# Altium PCB PCB1.PcbDoc
Units mil, origin at the board's own origin, x right, y up, seen from the top; angles counter-clockwise.
Board outline 3017.73 x 2679.53 mil, 4 copper layers (Top Layer, Layer 1, Layer 2, Bottom Layer), stack 62.449 mil thick; 49 components, 44 nets, 218 pads, 111 vias.
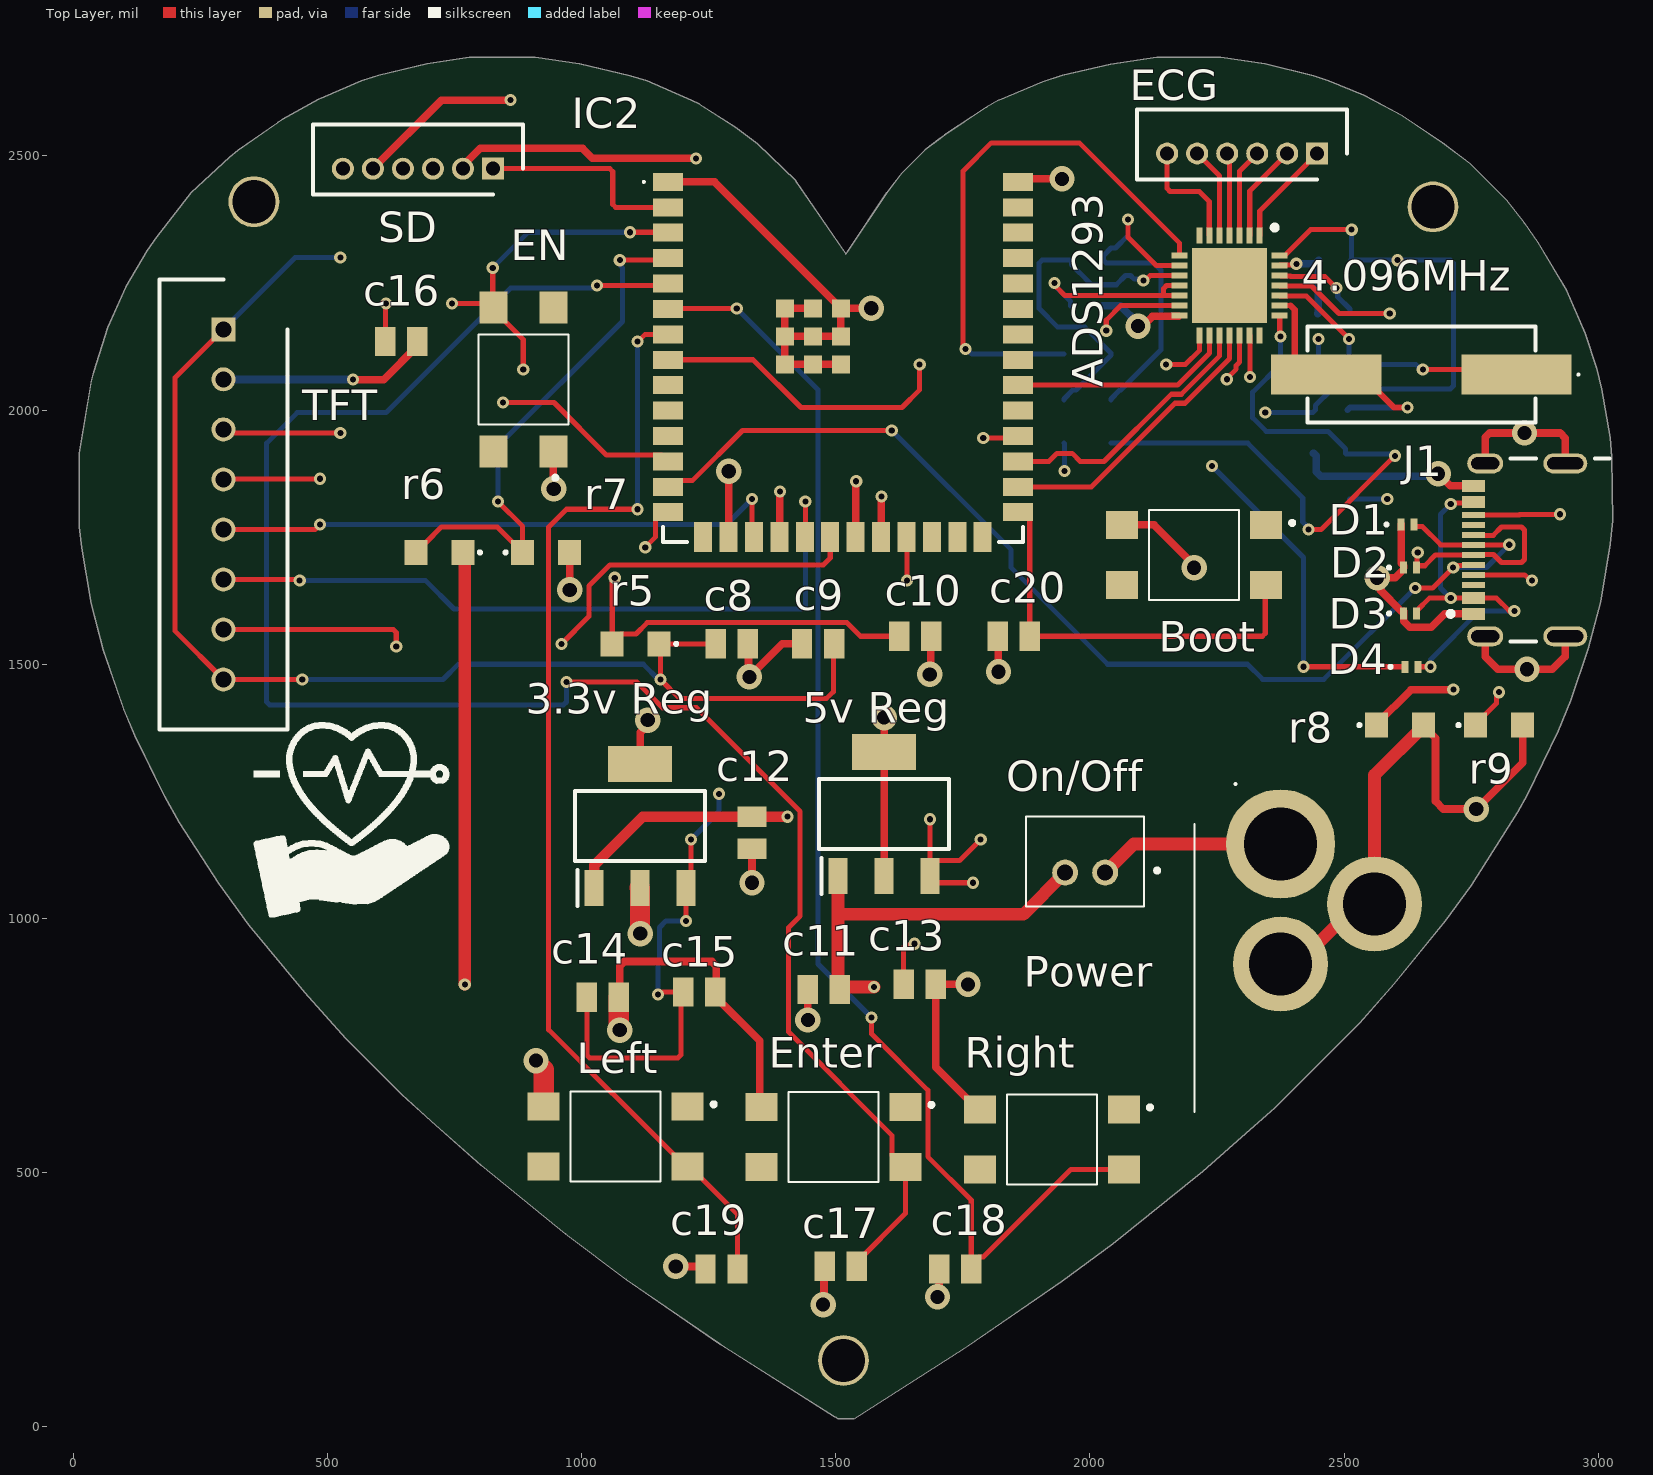
[diagram p0: Top Layer view]
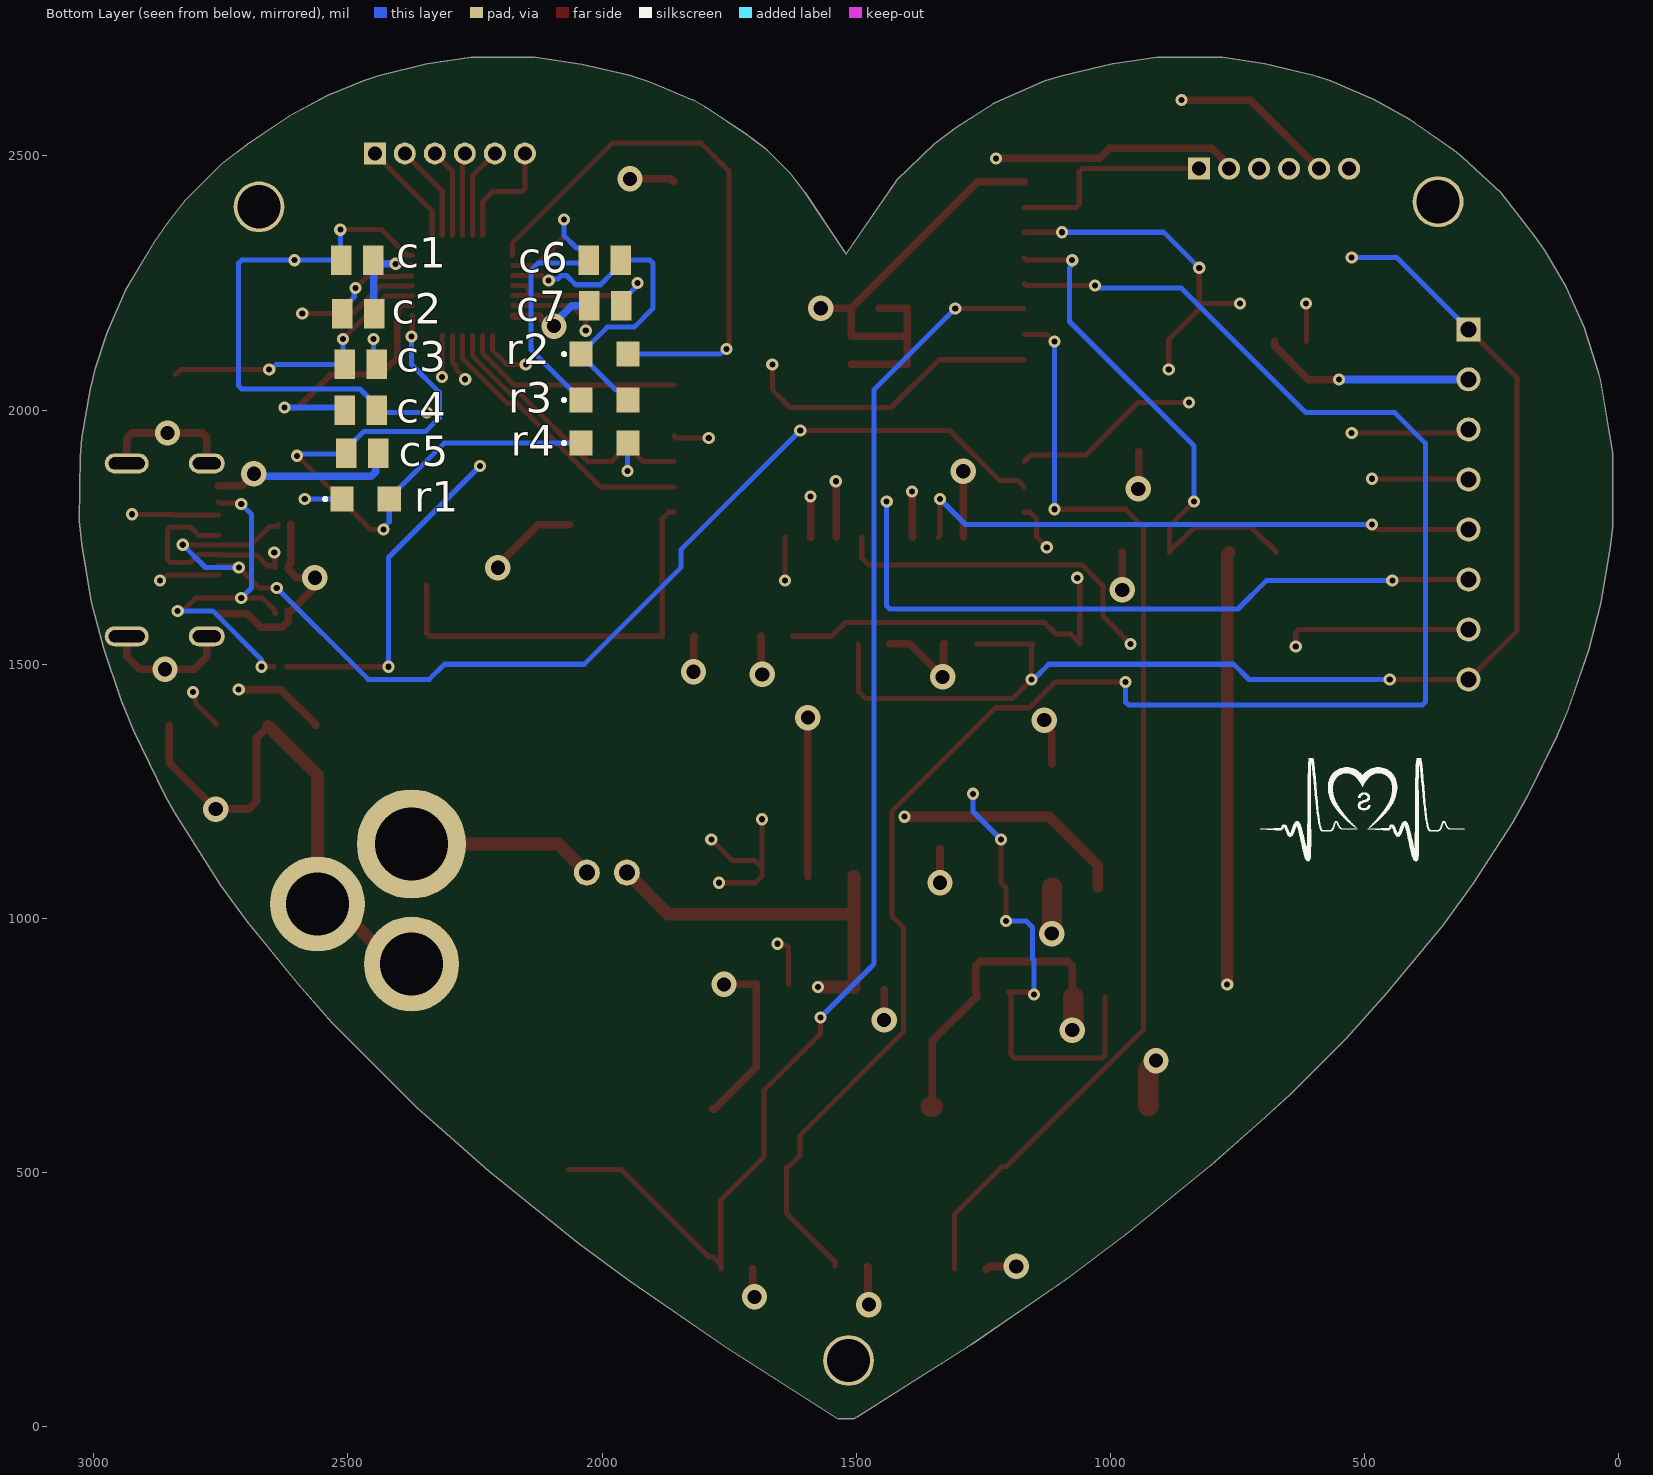
[diagram p1: Bottom Layer view, seen from below]
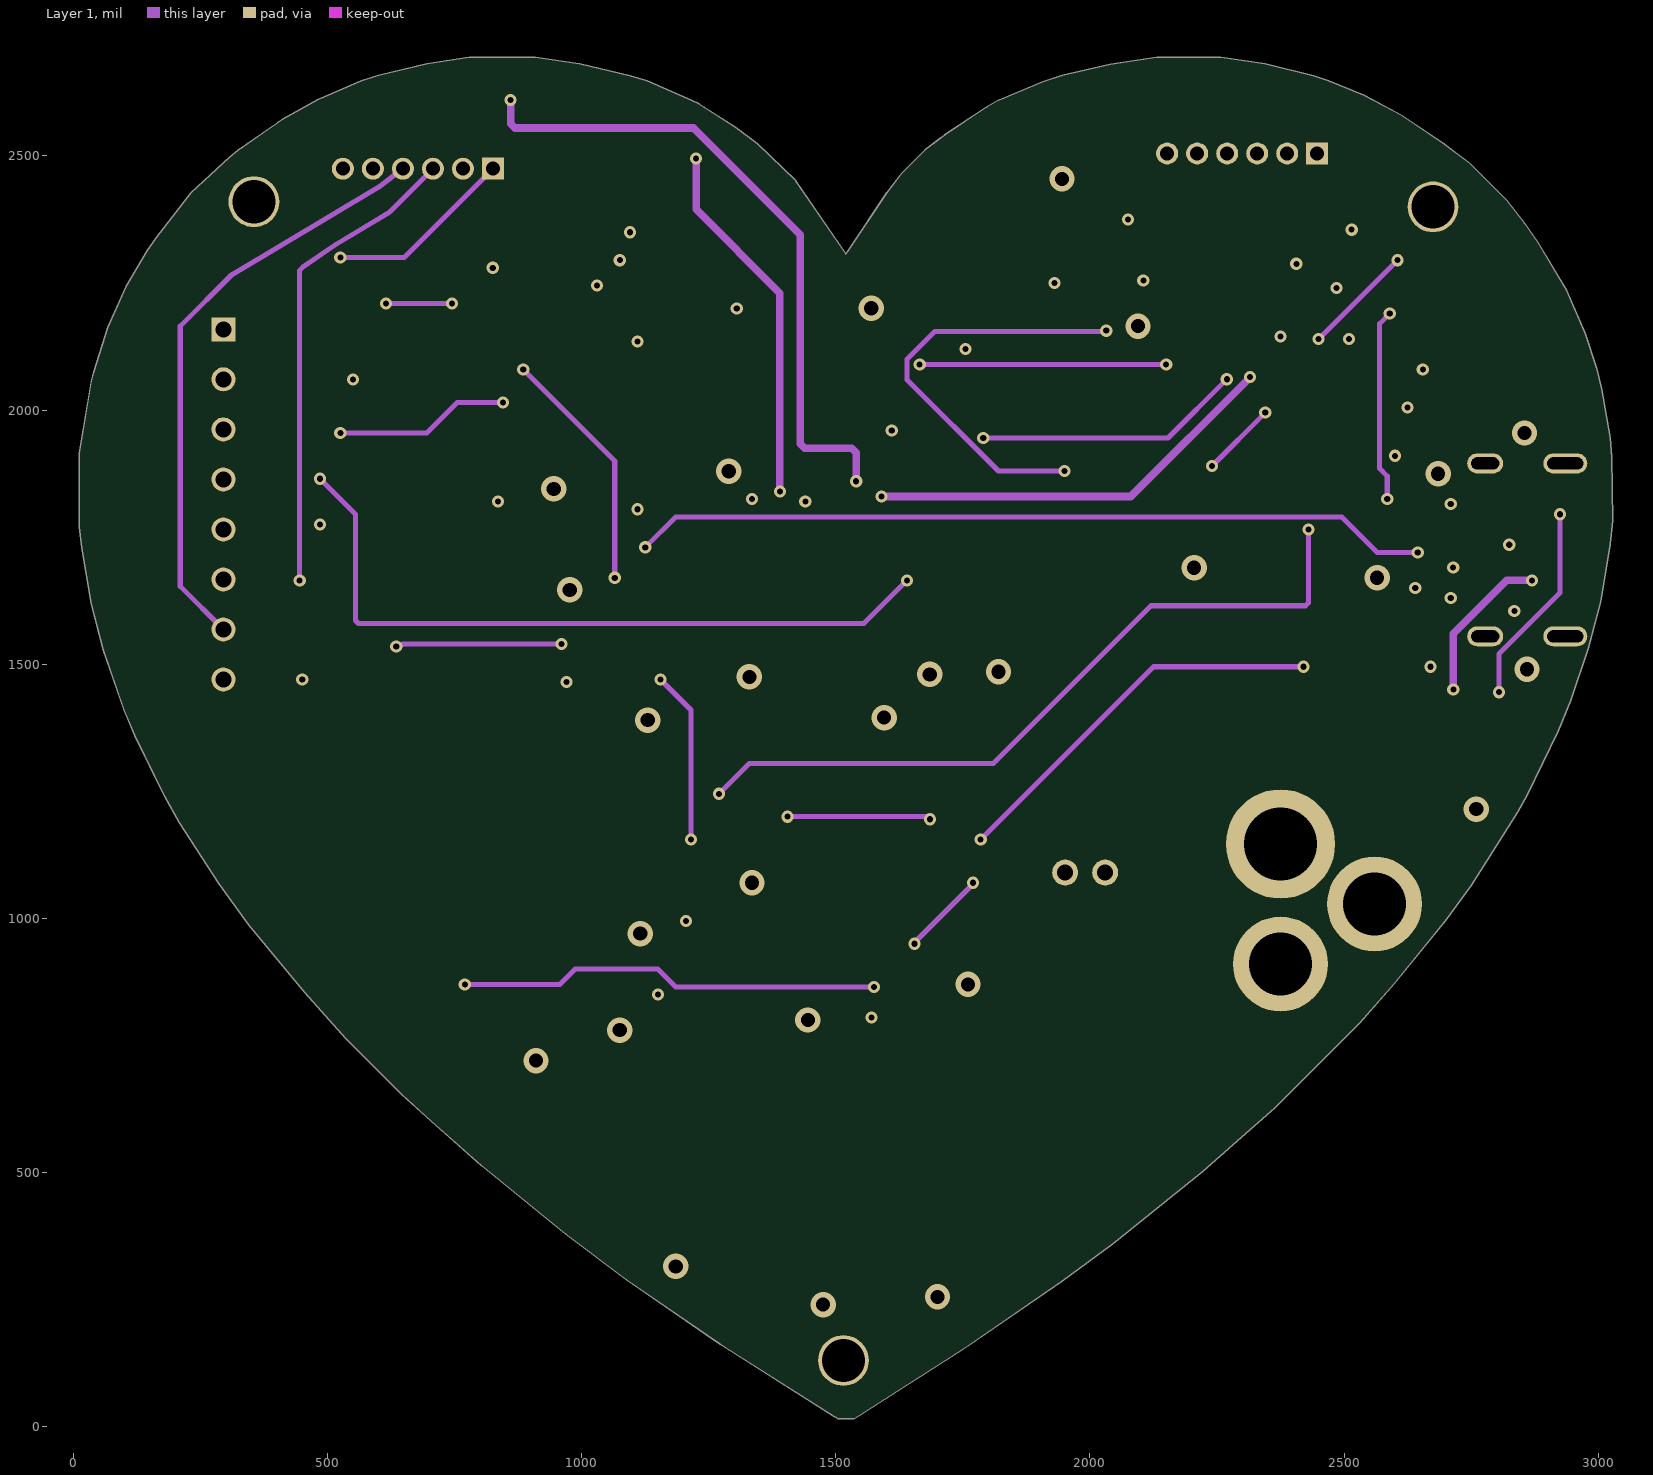
[diagram p2: Layer 1]
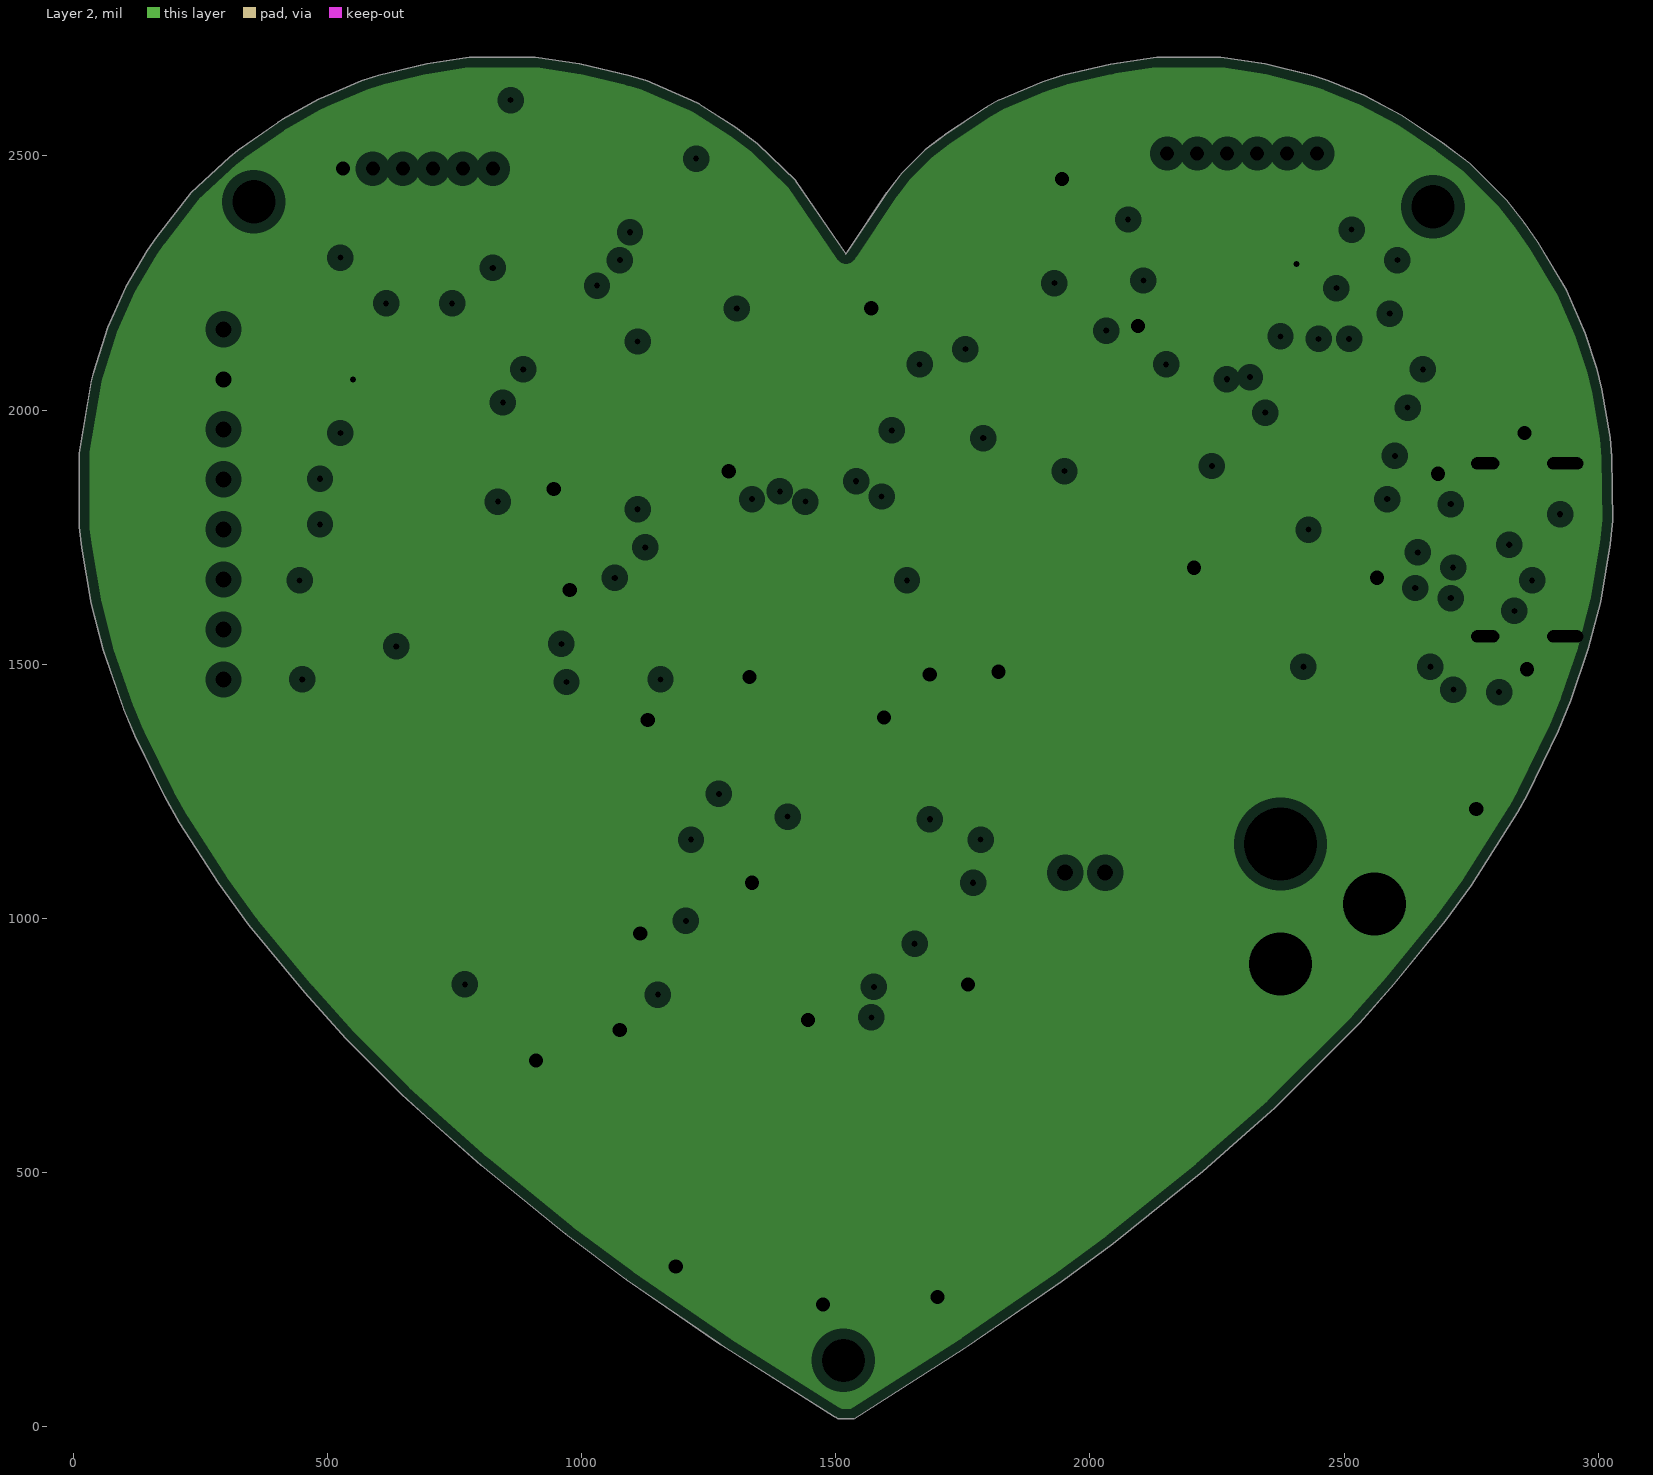
[diagram p3: Layer 2, clearances drawn from the general rule]
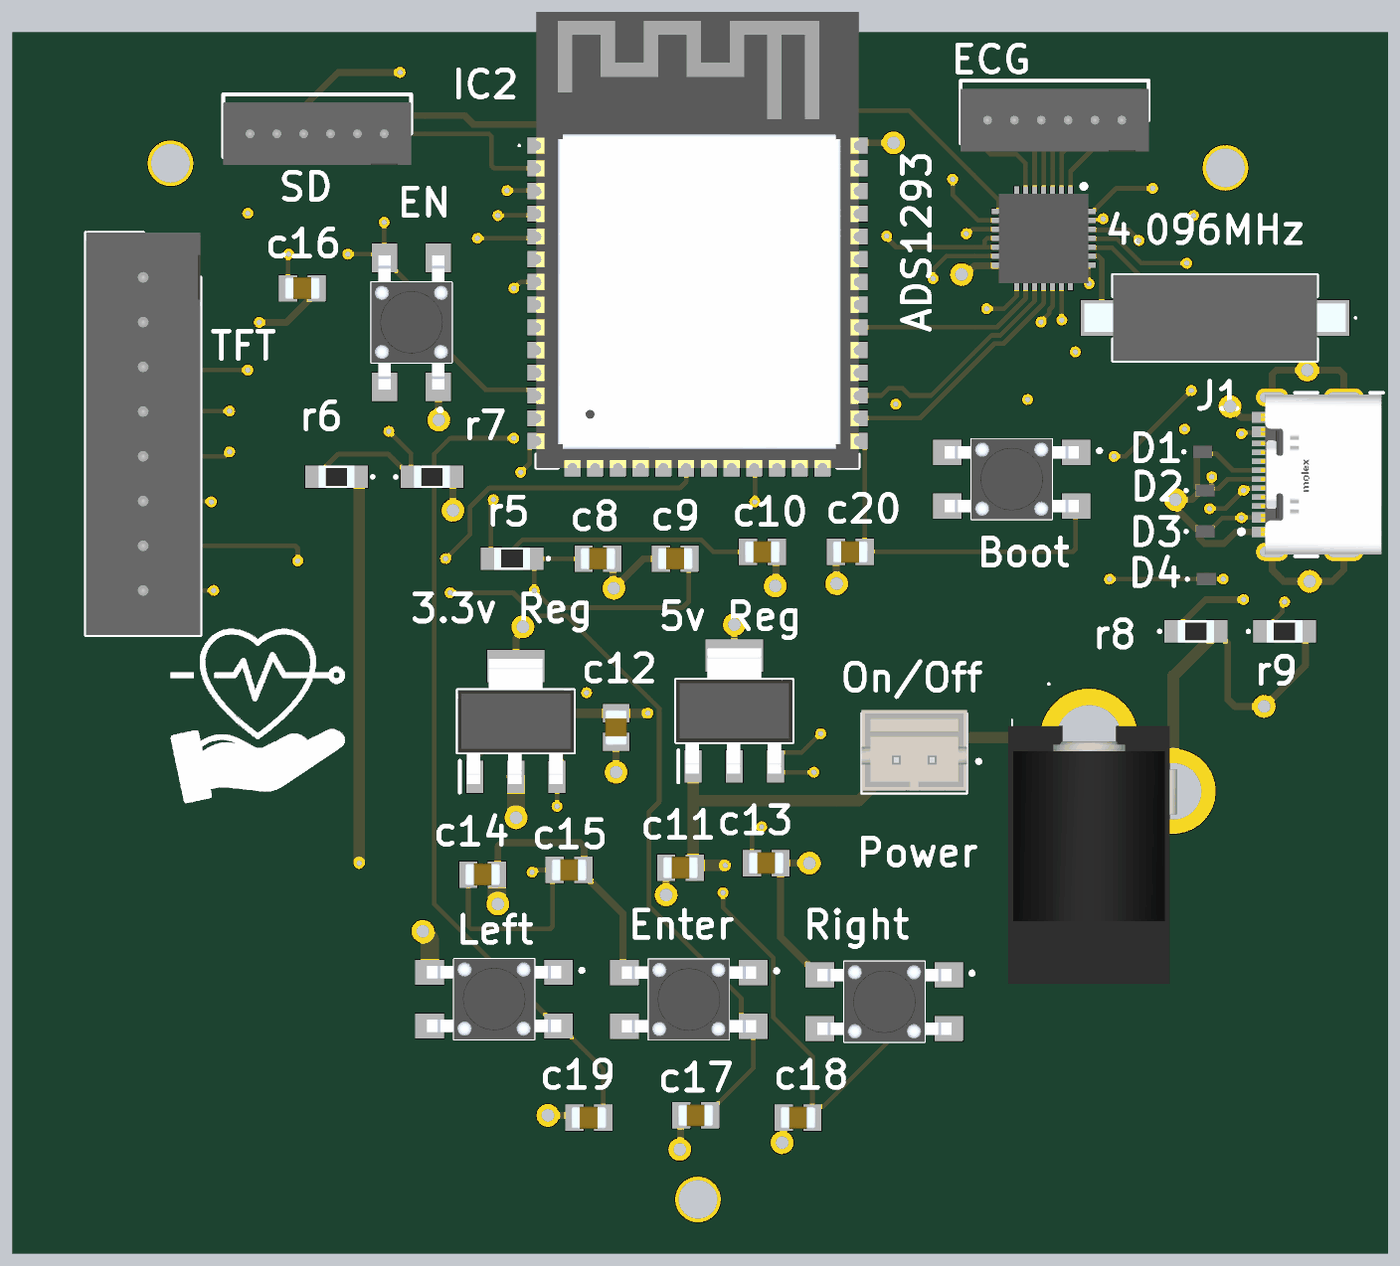
[diagram p4: 3D render of the assembled board from above, using the file's embedded part models]
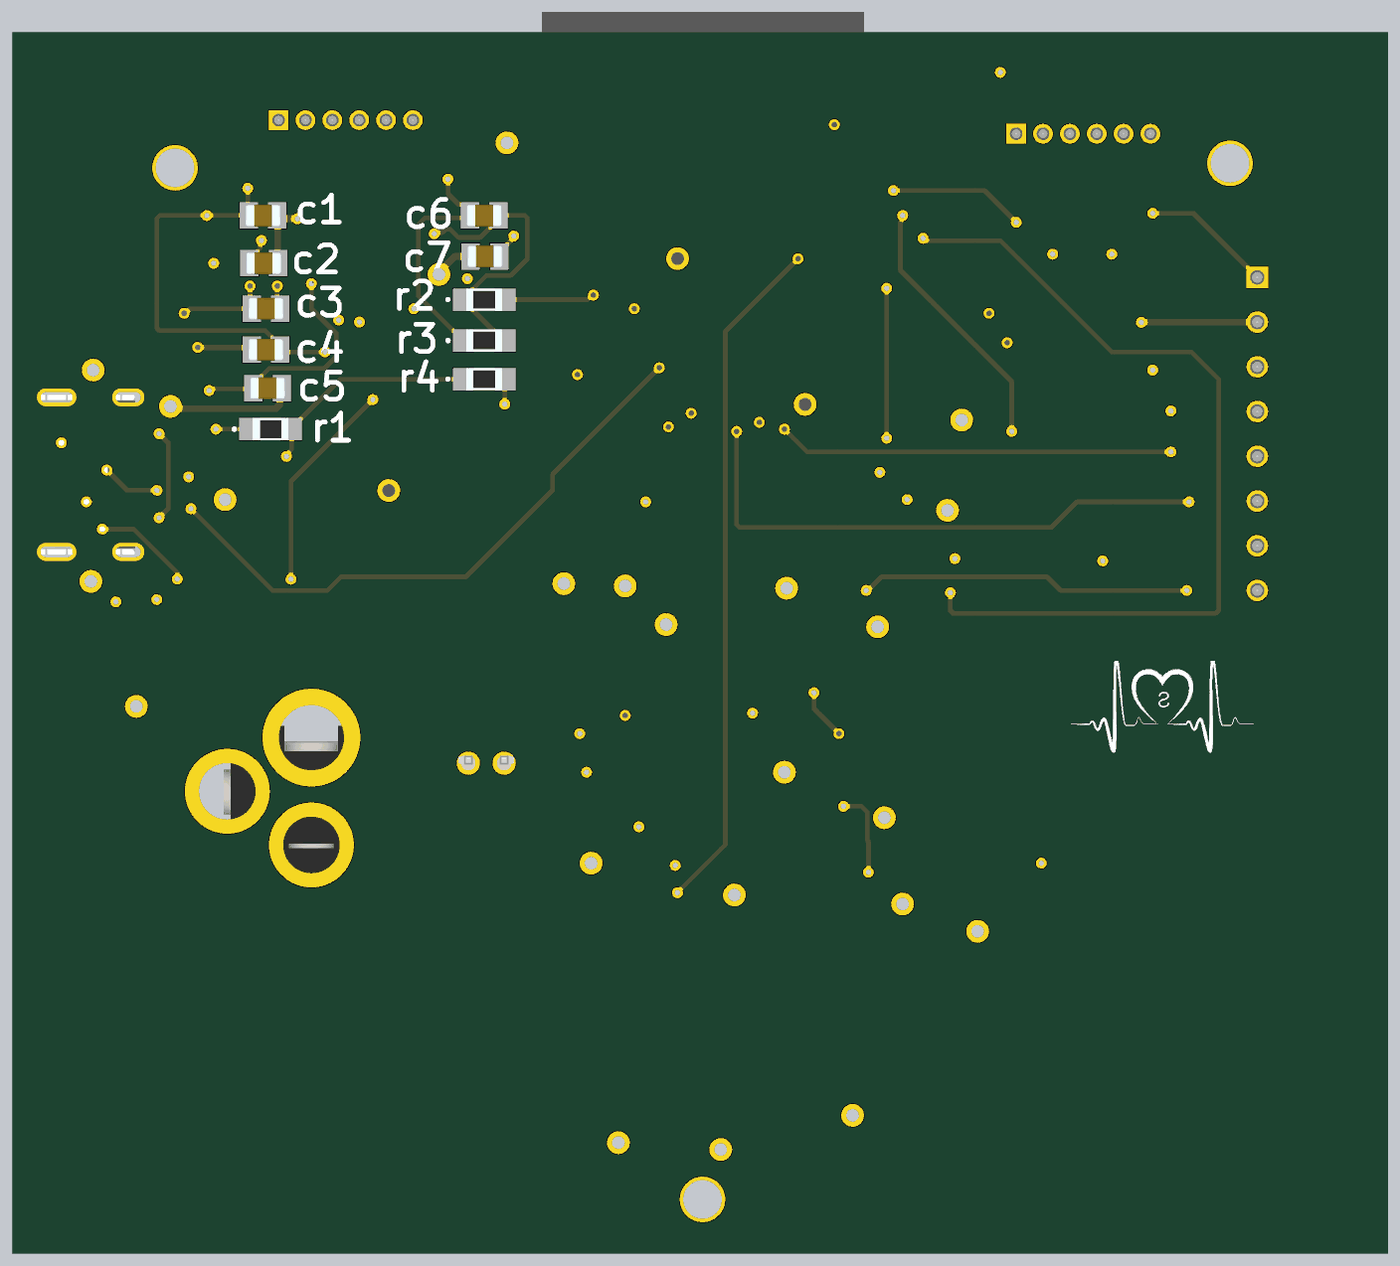
[diagram p5: 3D render of the assembled board from below, using the file's embedded part models]

## Layer stack, top to bottom
Top Solder: solder mask 0.4, Solder Resist, Dk 3.5
Top Layer: signal copper 1.378
Dielectric 2: prepreg 8.2835, PP-006, Dk 4.1
Layer 1: signal copper 0.5984
Dielectric 1: dielectric 41.9291, FR-4, Dk 4.8
Layer 2: plane copper 0.5984, net DGND
Dielectric 3: prepreg 8.2835, PP-006, Dk 4.1
Bottom Layer: signal copper 1.378
Bottom Solder: solder mask 0.4, Solder Resist, Dk 3.5

## Board outline
179.24,1239.27 120.6,1359.9 120.6,1359.92 99.32,1410.08 99.31,1410.09 58.09,1527.85 58.08,1527.87 35.28,1619.07 35.28,1619.09 16.65,1729.11 16.65,1729.12 11.14,1770.76 11.13,1770.8 11.13,1915.2 11.14,1915.25 35.4,2059.35 35.41,2059.38 40.21,2075.21 67.39,2162.66 67.4,2162.69 103.12,2241.73 103.13,2241.75 145.08,2313.65 145.1,2313.67 164.06,2340.37 164.07,2340.38 231.59,2428.36 231.62,2428.4 306.88,2497.72 306.9,2497.74 323.57,2511.08 323.59,2511.09 402.06,2566.09 410.84,2571.94 410.86,2571.95 482.09,2611.59 482.1,2611.6 486.66,2613.88 486.68,2613.88 566.48,2647.7 566.5,2647.71 600.65,2658.91 600.67,2658.92 695.6,2681.52 695.62,2681.52 778.96,2694.46 779,2694.47 908.2,2694.47 908.24,2694.46 995.38,2681.52 995.4,2681.52 1094.8,2657.8 1094.82,2657.79 1128.29,2647.72 1128.32,2647.7 1215.72,2610.08 1215.74,2610.08 1230.94,2602.48 1230.96,2602.46 1302.86,2556.71 1302.88,2556.7 1346.04,2524.32 1346.07,2524.3 1421.38,2451.19 1421.42,2451.15 1520,2307.07 1524.49,2313.67 1600.49,2427.66 1600.5,2427.68 1611.92,2442.78 1629.99,2466.36 1630.01,2466.39 1675.61,2511.99 1675.64,2512.01 1701.55,2531.92 1714.33,2541.5 1714.34,2541.51 1796.87,2596.38 1796.89,2596.39 1820.45,2610.07 1820.48,2610.09 1907.11,2646.18 1907.14,2646.19 1945.85,2658.91 1945.88,2658.92 2040.28,2680.8 2040.3,2680.8 2131.76,2694.46 2131.8,2694.47 2257.2,2694.47 2257.24,2694.46 2344.38,2681.52 2344.41,2681.52 2440.04,2657.6 2440.06,2657.59 2469.7,2647.71 2469.72,2647.7 2538.88,2619.2 2538.91,2619.19 2614.14,2579.68 2614.17,2579.66 2693.66,2526.31 2693.68,2526.3 2747.56,2485.41 2747.59,2485.39 2819.79,2413.19 2819.81,2413.16 2854.88,2368.15 2854.89,2368.14 2881.49,2330.14 2881.5,2330.12 2938.39,2234.92 2938.4,2234.88 2974.88,2150.53 2974.89,2150.5 2997.11,2082.15 2997.12,2082.13 3007.52,2040.96 3007.52,2040.93 3023.35,1945.49 3023.35,1945.47 3026.78,1907.78 3026.78,1907.76 3028.86,1782.2 3028.86,1782.17 3023.33,1736.71 3023.33,1736.7 3004.72,1622.9 3004.72,1622.87 2980.8,1531 2980.79,1530.98 2946.01,1428.34 2946,1428.32 2921.69,1368.28 2921.68,1368.26 2860.76,1243.07 2860.75,1243.06 2841.75,1208.86 2841.75,1208.84 2750.51,1064.54 2750.5,1064.53 2699.13,994.76 2699.12,994.75 2598.46,870.87 2598.45,870.86 2531,794.03 2530.99,794.01 2363.79,626.81 2363.77,626.8 2315.23,584.06 2222.37,502.34 2222.36,502.33 2045.25,359.88 2045.24,359.88 1945.07,285.7 1945.06,285.69 1760.14,158.51 1751.36,152.66 1535.34,14.98 1535.2,14.94 1504.8,14.94 1504.64,14.99 1500.48,18.01 1497.44,19.54 1281.05,156.45 1281.04,156.46 1269.64,164.06 1087.34,289.49 1087.33,289.5 968.16,378.88 968.15,378.88 802.44,513.73 802.43,513.74 703.71,601.15 645.82,653.4 645.81,653.41 535.61,763.61 535.6,763.62 454.86,854 454.85,854.01 344.68,987.15 344.67,987.16 285.7,1068.33 285.69,1068.34 208.02,1188.88 208.01,1188.89

## Design rules (kind name [scope] priority, off if disabled: settings)
Clearance [All] p1: gap=7.8 ignorepadtopadclearanceinfootprint=FALSE
PlaneClearance [All] p1: clearance=20
PlaneConnect [All] p1: pad.planeconnectstyle=Relief pad.reliefexpansion=20 pad.reliefentries=4 pad.reliefconductorwidth=10 pad.reliefairgap=10 via.planeconnectstyle=Direct via.reliefexpansion=20 via.reliefentries=4 via.reliefconductorwidth=10 via.reliefairgap=10
PolygonConnect [All] p1: connectstyle=Relief reliefconductorwidth=10 reliefentries=4 polygonreliefangle="90 Angle" airgapwidth=10
RoutingVias [All] p1: holewidth=12 width=24 viastyle="Through Hole" minholewidth=12 minwidth=24 maxholewidth=12 maxwidth=24
SolderMaskExpansion [All] p1: expansion=2 istentingtop=FALSE
SupplyNets "Schematic Supply Nets" [InNet('DGND')] p1: voltage=0.000
Width [All] p1: maxlimit=40 minlimit=8 preferedwidth=10 checkconnectedcopper=TRUE
28 further rules are at their usual default settings.

## Components (designator, comment, footprint, x,y, rotation, side; value= is the part's Value field where it differs from the comment)
"3.3v Reg" "TL1963A-33DCYR" SOT230P700X180-4N 1114.45,1182.05 r90 top
4.096MHz "ECS-41-20-5PX-TR" ECS41205PXTR 2652.01,2070 r180 top
"5v Reg" "LM7805MPX_NOPB" SOT230P700X180-4N 1595,1205 r90 top
ADS1293 "ADS1293CISQX_NOPB" QFN50P500X500X80-29N 2275,2245 r270 top
Boot "TL3305BF100QG" TL3305BF160QG 2205,1715 r180 top
c1 "0.1uF" CAPC2012X140N 2481.5,2295 r180 bottom
c2 "1uF" CAPC2012X140N 2480,2190 r180 bottom
c3 "22pF" CAPC2012X140N 2475,2090 r180 bottom
c4 "22pF" CAPC2012X140N 2475,2000 r180 bottom
c5 "0.1uF" CAPC2012X140N 2471.5,1915 r180 bottom
c6 "1.5nF" CAPC2012X140N 1995,2295 r180 bottom
c7 "0.1uF" CAPC2012X140N 1993.5,2205 r180 bottom
c8 "22uF" CAPC2012X140N 1295,1540 r180 top
c9 "0.1uF" CAPC2012X140N 1465,1540 r0 top
c10 "1uF" CAPC2012X140N 1656.5,1555 r180 top
c11 "0.22uF" CAPC2012X140N 1476.5,860 r0 top
c12 "4.7uF" CAPC2012X140N 1335,1168.5 r270 top
c13 "0.1uF" CAPC2012X140N 1665,870 r180 top
c14 "10uF" CAPC2012X140N 1041.5,845 r0 top
c15 "10uF" CAPC2012X140N 1231.5,855 r0 top
c16 "0.1uF" CAPC2012X140N 645,2135 r0 top
c17 "0.1uF" CAPC2012X140N 1510,315 r180 top
c18 "0.1uF" CAPC2012X140N 1735,310 r180 top
c19 "0.1uF" CAPC2012X140N 1275,310 r180 top
c20 "0.1uF" CAPC2012X140N 1850,1555 r180 top
D1 "AQ3045-01ETG" AQ304501ETG 2625,1775 r0 top
D2 "AQ3045-01ETG" AQ304501ETG 2630,1690 r0 top
D3 "AQ3045-01ETG" AQ304501ETG 2630,1600 r0 top
D4 "AQ3045-01ETG" AQ304501ETG 2632.8,1495 r0 top
ECG "B6B-ZR__LF__SN_" SHDR6W50P0X150_1X6_1050X350X450P 2447.17,2505 r0 top
EN "TL3305BF100QG" TL3305BF160QG 885,2060 r90 top
Enter "TL3305BF100QG" TL3305BF160QG 1495,570 r180 top
IC2 "ESP32-S3-WROOM-1-N16" ESP32S3WROOM1N16 1513.94,2241.97 r0 top
J1 "217179-0001" FP-2171790001-MFG 2890,1725 r90 top
Left "TL3305BF100QG" TL3305BF160QG 1066.73,570.95 r180 top
On/Off "B2B-PH-K-S__LF__SN_" B2BPHKSLFSN 2030,1090 r0 top
Power "PJ-002A" PJ002A 2375,1146.22 r90 top
r1 "1M" ERJUP6 2465,1825 r180 bottom
r2 "100k" ERJUP6 1995,2110 r180 bottom
r3 "1M" ERJUP6 1995,2020 r180 bottom
r4 "1M" ERJUP6 1995,1935 r180 bottom
r5 "10k" ERJUP6 1106.26,1540 r180 top
r6 "100k" ERJUP6 720,1720 r180 top
r7 "47k" ERJUP6 930,1720 r0 top
r8 "5.1k" ERJUP6 2610,1380 r0 top
r9 "5.1k" ERJUP6 2805,1380 r0 top
Right "TL3305BF100QG" TL3305BF160QG 1925,565 r180 top
SD "B6B-ZR__LF__SN_" SHDR6W50P0X150_1X6_1050X350X450P 825.28,2475 r0 top
TFT "B08B-XASK-1__LF__SN_" SHDR8W60P0X250_1X8_2250X640X880P 295,2158.98 r90 top

## Footprints (in the part's own frame and the unit in brackets; to place one, negate y for a bottom-side part, rotate by r counter-clockwise, add the part's x,y. Pads: shape width x height; smd on the part's side, far side on the other; paste and mask are expansions set on the pad)
AQ304501ETG [mm]
  rect 0.35x0.6 smd: 1(-0.325,0) 2(0.325,0)
  silkscreen extent -1.1,-0.05 -1,0.05, body extent -0.54,-0.34 0.54,0.34, height 0.43
B2BPHKSLFSN [mm]
  round 1.3 hole 0.8: 1(0,0) 2(-2,0)
  silkscreen extent -3.95,-1.7 2.7,2.8, body extent -3.95,-1.53 1.95,2.97, height 5.91
CAPC2012X140N [mm]
  rect 1.02x1.47 smd: 1(-0.8,0) 2(0.8,0)
  body extent -1,-0.63 1,0.63, height 1.4
ECS41205PXTR [mm]
  rect 5.5x2 smd: 1(-4.75,0) 2(4.75,0)
  silkscreen extent -7.9,-2.4 5.7,2.4, body extent -7.3,-2.4 7.3,2.4, height 4.4
ERJUP6 [mm]
  rect 1.15x1.25 smd: 1(-1.175,0) 2(1.175,0)
  silkscreen extent -2.07,-0.05 -1.98,0.05, body extent -1,-0.63 1,0.63, height 0.6
ESP32S3WROOM1N16 [mm]
  rect 1.5x0.9 smd: 1(-8.75,5.26) 2(-8.75,3.99) 3(-8.75,2.72) 4(-8.75,1.45) 5(-8.75,0.18) 6(-8.75,-1.09) 7(-8.75,-2.36) 8(-8.75,-3.63) 9(-8.75,-4.9) 10(-8.75,-6.17) 11(-8.75,-7.44) 12(-8.75,-8.71) 13(-8.75,-9.98) 14(-8.75,-11.25) 27(8.75,-11.25) 28(8.75,-9.98) 29(8.75,-8.71) 30(8.75,-7.44) 31(8.75,-6.17) 32(8.75,-4.9) 33(8.75,-3.63) 34(8.75,-2.36) 35(8.75,-1.09) 36(8.75,0.18) 37(8.75,1.45) 38(8.75,2.72) 39(8.75,3.99) 40(8.75,5.26)
  rect 0.9x1.5 smd: 15(-6.985,-12.5) 16(-5.715,-12.5) 17(-4.445,-12.5) 18(-3.175,-12.5) 19(-1.905,-12.5) 20(-0.635,-12.5) 21(0.635,-12.5) 22(1.905,-12.5) 23(3.175,-12.5) 24(4.445,-12.5) 25(5.715,-12.5) 26(6.985,-12.5)
  rect 0.9x0.9 smd: 41(-1.5,-2.46) 42(-1.5,-1.06) 43(-2.9,-1.06) 44(-2.9,-2.46) 45(-2.9,-3.86) 46(-1.5,-3.86) 47(-0.1,-3.86) 48(-0.1,-2.46) 49(-0.1,-1.06)
  silkscreen extent -10,-12.75 9,5.31, body extent -9,-12.76 9,12.74, height 3.25
FP-2171790001-MFG [mm]
  rect 0.6x1.15 smd paste+0 mask+0: A1B12(-3.2,3.425) A4B9(-2.4,3.425) B1A12(3.2,3.425) B4A9(2.4,3.425)
  rect 0.3x1.15 smd paste+0 mask+0: A5(-1.25,3.425) A6(-0.25,3.425) A7(0.25,3.425) A8(1.25,3.425) B5(1.75,3.425) B6(0.75,3.425) B7(-0.75,3.425) B8(-1.75,3.425)
  rrect100% 1x1.8 hole 1.4 slot 0.6 at 0 deg paste-2539.97 mask+0: S1(-4.32,2.85) S2(4.32,2.85)
  rrect100% 1x2.2 hole 1.8 slot 0.6 at 0 deg paste-2539.97 mask+0: S3(-4.32,-1.15) S4(4.32,-1.15)
  silkscreen extent -4.57,-3.35 4.57,4.7, body extent -4.92,-3.45 4.92,4.1, height 0.25
PJ002A [mm]
  round 5.46 hole 3.64: 1(0,0)
  round 4.74 hole 3.16: 2(-6,0) 3(-3,-4.7)
  silkscreen extent -13.4,2.2 3.05,4.3, body extent -13.75,-4.9 0.65,4.5, height 11
QFN50P500X500X80-29N [mm]
  rect 0.8x0.3 smd: 1(-2.5,1.5) 2(-2.5,1) 3(-2.5,0.5) 4(-2.5,0) 5(-2.5,-0.5) 6(-2.5,-1) 7(-2.5,-1.5) 15(2.5,-1.5) 16(2.5,-1) 17(2.5,-0.5) 18(2.5,0) 19(2.5,0.5) 20(2.5,1) 21(2.5,1.5)
  rect 0.3x0.8 smd: 8(-1.5,-2.5) 9(-1,-2.5) 10(-0.5,-2.5) 11(0,-2.5) 12(0.5,-2.5) 13(1,-2.5) 14(1.5,-2.5) 22(1.5,2.5) 23(1,2.5) 24(0.5,2.5) 25(0,2.5) 26(-0.5,2.5) 27(-1,2.5) 28(-1.5,2.5)
  rect 3.75x3.75 smd: 29(0,0)
  silkscreen extent -3.02,2.13 -2.78,2.38, body extent -2.5,-2.5 2.5,2.5, height 0.8
SHDR6W50P0X150_1X6_1050X350X450P [mm]
  rect 1.1x1.1 hole 0.7: 1(0,0)
  round 1.1 hole 0.7: 2(-1.5,0) 3(-3,0) 4(-4.5,0) 5(-6,0) 6(-7.5,0)
  silkscreen extent -9,-1.3 1.5,2.2, body extent -9,-1.75 1.5,1.75, height 4.5
SHDR8W60P0X250_1X8_2250X640X880P [mm]
  rect 1.2x1.2 hole 0.8: 1(0,0)
  round 1.2 hole 0.8: 2(-2.5,0) 3(-5,0) 4(-7.5,0) 5(-10,0) 6(-12.5,0) 7(-15,0) 8(-17.5,0)
  silkscreen extent -20,-3.2 2.5,3.2, body extent -20,-3.2 2.5,3.2, height 8.8
SOT230P700X180-4N [mm]
  rect 1.8x0.95 smd: 1(-3.1,2.3) 2(-3.1,0) 3(-3.1,-2.3)
  rect 1.8x3.2 smd: 4(3.1,0)
  silkscreen extent -4,-3.25 1.75,3.25, body extent -3.5,-3.25 3.5,3.25, height 1.68
TL3305BF160QG [mm]
  rect 1.6x1.4 smd: 1(-3.6,-1.5) 2(3.6,-1.5) 3(-3.6,1.5) 4(3.6,1.5)
  silkscreen extent -5,-2.25 2.25,2.25, body extent -3.75,-2.25 3.75,2.25, height 4.9

## Part data
"3.3v Reg": "Power Supply", Manufacturer_Name="Texas Instruments", Mouser Part Number=595-TL1963A-33DCYR, Arrow Part Number=TL1963A-33DCYR, Arrow Price/Stock=https://www.arrow.com/en/products/tl1963a-33dcyr/texas-instruments?utm_currency=USD&region=nac, Datasheet Link=http://www.ti.com/lit/gpn/tl1963a, Height=1.8mm, Manufacturer_Part_Number=TL1963A-33DCYR, Mouser Price/Stock=https://www.mouser.co.uk/ProductDetail/Texas-Instruments/TL1963A-33DCYR?qs=IK5e5L0zOXhRu%2FNTAfJNEA%3D%3D
4.096MHz: "Crystal or Oscillator", Manufacturer_Name=ECS, Mouser Part Number=520-CSM409-20-X, Arrow Part Number=ECS-41-20-5PX-TR, Arrow Price/Stock=https://www.arrow.com/en/products/ecs-41-20-5px-tr/ecs-international, Datasheet Link=https://www.ecsxtal.com/store/pdf/csm-7x.pdf, Height=4.3mm, Manufacturer_Part_Number=ECS-41-20-5PX-TR, Mouser Price/Stock=https://www.mouser.co.uk/ProductDetail/ECS/ECS-41-20-5PX-TR?qs=CkbNAJEAr%2FSFHGf3GK%252BDrQ%3D%3D
"5v Reg": "Integrated Circuit", Arrow Part Number=LM7805MPX/NOPB, Manufacturer_Name="Texas Instruments", Mouser Part Number=595-LM7805MPX/NOPB, Arrow Price/Stock=https://www.arrow.com/en/products/lm7805mpxnopb/texas-instruments?region=nac, Datasheet Link=https://www.arrow.com/en/products/lm7805mpxnopb/texas-instruments, Height=1.8mm, Manufacturer_Part_Number=LM7805MPX/NOPB, Mouser Price/Stock=https://www.mouser.co.uk/ProductDetail/Texas-Instruments/LM7805MPX-NOPB?qs=gO6GG99qvRCSwIVAoVKHPw%3D%3D
ADS1293: "Integrated Circuit", Arrow Part Number=ADS1293CISQX/NOPB, Manufacturer_Name="Texas Instruments", Mouser Part Number=595-ADS1293CISQXNPB, Arrow Price/Stock=https://www.arrow.com/en/products/ads1293cisqxnopb/texas-instruments?region=nac, Datasheet Link=https://www.arrow.com/en/products/ads1293cisqxnopb/texas-instruments?region=nac, Height=0.8mm, Manufacturer_Part_Number=ADS1293CISQX/NOPB, Mouser Price/Stock=https://www.mouser.co.uk/ProductDetail/Texas-Instruments/ADS1293CISQX-NOPB?qs=T1E5mKGHTGVRqLM5czdGYQ%3D%3D
Boot EN Enter Left Right: "Switch", Manufacturer_Name=E-Switch, Mouser Part Number=612-TL3305BF100QG, Datasheet Link=https://configured-product-images.s3.amazonaws.com/2D/specs/TL3305BF100QG.pdf, Manufacturer_Part_Number=TL3305BF100QG, Mouser Price/Stock=https://www.mouser.co.uk/ProductDetail/E-Switch/TL3305BF100QG?qs=IKkN%2F947nfDIPwqPQja%252BvQ%3D%3D
c1 c2 c3 c4 c5 c6 c7 c8 c9 c10 c11 c12 c13 c14 c15 c16 c17 c18 c19 c20: library part 0805_1, "Capacitor", Manufacturer_Name=KEMET, Manufacturer_Part_Number=C0805C274K1RACTU, Mouser Part Number=80-C0805C274K1RACTU, Datasheet Link=https://search.kemet.com/component-documentation/download/specsheet/C0805C274K1RACTU, Height=1.4mm, Mouser Price/Stock=https://www.mouser.co.uk/ProductDetail/KEMET/C0805C274K1RACTU?qs=wT7LY0lnAe2hDy7V5z73eA%3D%3D
D1 D2 D3 D4: "TVS Diode (Bi-directional)", Manufacturer_Name=LITTELFUSE, Mouser Part Number=576-AQ3045-01ETG, Arrow Part Number=AQ3045-01ETG, Arrow Price/Stock=https://www.arrow.com/en/products/aq3045-01etg/littelfuse?region=nac, Datasheet Link=http://m.littelfuse.com/~/media/electronics/datasheets/tvs_diode_arrays/littelfuse_tvs_diode_array_aq3045_datasheet.pdf.pdf, Height=0.42mm, Manufacturer_Part_Number=AQ3045-01ETG, Mouser Price/Stock=https://www.mouser.co.uk/ProductDetail/Littelfuse/AQ3045-01ETG?qs=lM4gFlnEeEMEfe%252B5jSw4OA%3D%3D
ECG SD: "Connector", Manufacturer_Name="JST (JAPAN SOLDERLESS TERMINALS)", Manufacturer_Part_Number="B6B-ZR (LF)(SN)", Height=4.5mm
IC2: "Integrated Circuit", Manufacturer_Name="Espressif Systems", Mouser Part Number=356-ESP32S3WROOM1N16, Datasheet Link=https://www.espressif.com/sites/default/files/documentation/esp32-s3-wroom-1_wroom-1u_datasheet_en.pdf, Height=3.25mm, Manufacturer_Part_Number=ESP32-S3-WROOM-1-N16, Mouser Price/Stock=https://www.mouser.co.uk/ProductDetail/Espressif-Systems/ESP32-S3-WROOM-1-N16?qs=Li%252BoUPsLEntjPrtJwwS5Pw%3D%3D
J1: "CONN RCP USB2.0 TYP C 24P SMD RA", LCSC Part Number=C3197684, Manufacturer=Molex, Supplier Part Number=900-2171790001CT-ND, Category=Connectors, Manufacturer Part Number=217179-0001, Pricing="1=0,79, 10=0,645, 25=0,5948, 50=0,5594, 100=0,5259, 250=0,48484, 500=0,45592 (USD)", RoHS=No, Stock=7013, Supplier=Digikey
On/Off: "Circulator or Directional Coupler", Manufacturer_Name="JST (JAPAN SOLDERLESS TERMINALS)", Manufacturer_Part_Number="B2B-PH-K-S (LF)(SN)", Datasheet Link=http://www.jst-mfg.com/product/pdf/eng/ePH.pdf, Height=6mm
Power: "Integrated Circuit", Manufacturer_Name="Same Sky", Mouser Part Number=490-PJ-002A, Arrow Part Number=PJ-002A, Arrow Price/Stock=https://www.arrow.com/en/products/pj-002a/cui-devices?utm_currency=USD&region=europe, Datasheet Link=https://www.sameskydevices.com/product/resource/supplyframepdf/pj-002a.pdf, Height=11mm, Manufacturer_Part_Number=PJ-002A, Mouser Price/Stock=https://www.mouser.co.uk/ProductDetail/CUI-Devices/PJ-002A?qs=WyjlAZoYn51CKfAix9Mngw%3D%3D
r1 r2 r3 r4 r5 r6 r7 r8 r9: library part 0805, "Resistor", Manufacturer_Name=Panasonic, Manufacturer_Part_Number=ERJ-UP6D36R0V, Mouser Part Number=667-ERJ-UP6D36R0V, Datasheet Link=https://industrial.panasonic.com/cdbs/www-data/pdf/RDP0000/AOA0000C337.pdf, Height=0.7mm, Mouser Price/Stock=https://www.mouser.co.uk/ProductDetail/Panasonic/ERJ-UP6D36R0V?qs=ZcfC38r4PouQYziqW4pNbg%3D%3D
TFT: "Connector", Manufacturer_Name="JST (JAPAN SOLDERLESS TERMINALS)", Manufacturer_Part_Number="B08B-XASK-1 (LF)(SN)", Datasheet Link=http://uk.rs-online.com/web/p/products/1667521, Height=8.8mm

## Free pads (board coordinates)
  round 100 hole 85: 1(2675,2400) 2(1515,130) 3(355,2410)

## Via types
v1: diameter 24, hole 12, Top Layer to Bottom Layer, 85 vias
v2: diameter 50, hole 28, Top Layer to Bottom Layer, 26 vias

## Nets (pads, with @x,y where several pads share a name; then routed paths per layer and width w, separated by ;. In a path a pad name is that pad's centre, name@x,y a point inside that pad or via, vN(x,y) a via of type N, cw(c..) or ccw(c..) an arc to the next point about the centre after c; other vN are vias at no path point)
0: Boot.3 c20.1 IC2.27 | length 821.4
  Top Layer w10: IC2.27 1868.78,1799.05 1881.5,1786.34 c20.1 2339.14,1555 2345,1560.86 2345,1654.21 Boot.3
3.3v: "3.3v Reg.3" ADS1293.22 c5.1 c8.2 c9.2 c14.1 c15.1 IC2.2 r1.2 r4.1 r5.1 SD.1 TFT.1 TFT.8 | length 7374.1
  Top Layer w10: TFT.1 200,2063.98 200,1565 TFT.8 v1(450,1470) ; SD.1 1055.13,2475 1060.99,2469.14 1060.99,2404.91 1066.85,2399.05 IC2.2 ; c14.1 1010,730.86 1015.86,725 1189.14,725 1195,730.86 1195,850 c15.1 1158.79,855 1153.79,850 v1(1150,850) ; v1(1205,995) 1205,1060 1215,1070 v1(1215,1155) ; c8.2 r5.1 1155,1537.52 v1(1155,1470) 1192.8,1432.2 1481.34,1432.2 1495,1445.86 1495,1538.5 c9.2 ; ADS1293.22 2373.42,2156.58 2375,2155 v1(2375,2145) ; v1(2430,1765) 2455,1765 v1(2600,1910)
  Layer 1 w10: v1(525,2300) 650.28,2300 SD.1 ; v1(1155,1470) 1215,1410 v1(1215,1155) ; v1(1270,1245) 1330,1305 1810,1305 2120,1615 2424.14,1615 2430,1620.86 v1(2430,1765)
  Bottom Layer w10: TFT.1 436.02,2300 v1(525,2300) ; v1(450,1470) 727.13,1470 757.13,1500 1121.21,1500 1151.21,1470 v1(1155,1470) ; v1(1150,850) 1150,917.8 1152.8,920.6 1152.8,981.94 1165.86,995 v1(1205,995) ; v1(1215,1155) 1270,1210 v1(1270,1245) ; r4.1 2310.71,1935 2418.74,1826.97 r1.2 2418.74,1780.05 2430,1768.79 v1(2430,1765) ; v1(2375,2145) 2375,2089.93 2320.2,2035.13 2320.2,1984.73 2346.66,1958.26 2468.59,1958.26 2502.99,1923.86 c5.1 2504.24,1913.76 2592.46,1913.76 2596.21,1910 v1(2600,1910)
4: IC2.4 r6.2 r7.1 | length 1046.6
  Top Layer w10: r6.2 673.74,1721.97 691.38,1739.61 693.35,1739.61 723.74,1770 833.74,1770 864.13,1739.61 866.1,1739.61 r7.1@883.74,1721.97 ; v1(835,1820) 883.74,1771.26 r7.1@883.74,1721.97 ; r7.1 r7.1@883.74,1721.97 ; v1(1075,2295) 1165.39,2295 IC2.4
  Bottom Layer w10: v1(835,1820) 835,1929.39 1080,2174.39 1080,2280 1077.68,2282.32 1077.68,2292.32 v1(1075,2295)
5: c17.1 Enter.3 IC2.5 | length 3669.4
  Top Layer w10: v1(970,1465) 1108.46,1465 1159.06,1414.4 1225.67,1414.4 1429.8,1210.27 1429.8,1004.49 1407.2,981.89 1407.2,776.1 1610.24,573.06 1610.24,533.5 1632.8,510.94 Enter.3 1636.73,419.09 1541.5,323.86 c17.1 ; v1(1030,2245) 1165.39,2245 IC2.5
  Bottom Layer w10: v1(970,1465) 970,1425.86 964.14,1420 385.86,1420 380,1425.86 380,1935 440,1995 615,1995 860,2240 1025,2240 v1(1030,2245)
5v: "3.3v Reg.1" "5v Reg.3" ADS1293.28 c1.1 c3.2 c4.2 c12.1 c13.2 D4.1 | length 4285.6
  Top Layer w10: 1023.9,1060 1024.58,1060.68 ; c13.2 1633.5,943.5 1637.32,947.32 1652.32,947.32 v1(1655,950) ; v1(1685,1195) 1685,1083.5 1685.55,1082.95 ; v1(1770,1070) 1698.5,1070 1685.55,1082.95 ; v1(1785,1155) 1743.39,1113.39 1699.25,1113.39 1685.55,1099.68 1685.55,1082.95 ; ADS1293.28 2383.27,2304.05 2434.21,2355 v1(2515,2355) ; v1(2420,1495) D4.1
  Top Layer w20: 1024.58,1060.68 1024.58,1104.58 1120,1200 c12.1 v1(1405,1200)
  Layer 1 w10: v1(1405,1200) 1680,1200 v1(1685,1195) ; v1(1655,950) 1655,952.5 1770,1067.5 v1(1770,1070) ; v1(1785,1155) 2125,1495 v1(2420,1495) ; v1(2240,1890) v1(2345,1995) ; v1(2450,2140) v1(2605,2295)
  Bottom Layer w10: v1(2240,1890) 2420,1710 v1(2420,1495) ; v1(2345,1995) 2438.5,1995 c4.2 2443.5,2008.86 2476.38,2041.74 2709.14,2041.74 2715,2047.59 2715,2289.14 2709.14,2295 v1(2605,2295) c1.1 2515,2297.01 v1(2515,2355) ; c3.2 2450,2096.5 v1(2450,2140)
6: c18.1 IC2.6 Right.3 | length 2594.8
  Top Layer w10: IC2.6 1170.39,2200 v1(1305,2200) ; v1(1570,805) 1570,772.94 1681.03,661.91 1681.03,531.03 1766.5,445.56 c18.1@1766.5,318.86 ; c18.1 c18.1@1766.5,318.86 ; Right.3 1962.44,505.94 1790.43,333.94 1781.57,333.94 c18.1@1766.5,318.86
  Bottom Layer w10: v1(1305,2200) 1464.8,2040.2 1464.8,910.2 v1(1570,805)
7: c19.1 IC2.7 Left.3 | length 2203.7
  Top Layer w10: v1(1110,1805) 970,1805 935,1770 935,780.68 1060.62,655.07 1061.35,655.07 1204.53,511.89 Left.3 1212.4,511.89 1306.5,417.8 c19.1 ; v1(1110,2135) 1110.87,2135 1124.92,2149.05 IC2.7
  Bottom Layer w10: v1(1110,1805) v1(1110,2135)
8: IC2.12 TFT.3 | length 950.3
  Top Layer w10: TFT.3 302.13,1955 v1(525,1955) ; v1(845,2015) 945.24,2015 1048.47,1911.77 1156.73,1911.77 IC2.12
  Layer 1 w10: v1(525,1955) 695,1955 755,2015 v1(845,2015)
9: IC2.17 TFT.5 | length 1141.5
  Top Layer w10: TFT.5 475.28,1765.28 v1(485,1775) ; v1(1335,1825) 1335,1753.78 IC2.17
  Bottom Layer w10: v1(485,1775) 1285,1775 v1(1335,1825)
10: IC2.18 SD.2 | length 1301
  Top Layer w15: SD.2 766.22,2480.89 800.33,2515 1001.45,2515 1021.15,2495.3 1224.7,2495.3 v1(1225,2495) ; IC2.18 1389.47,1750.37 1389.47,1839.47 v1(1390,1840)
  Layer 1 w15: v1(1225,2495) 1225,2395 1390,2230 v1(1390,1840)
11: IC2.19 SD.3 TFT.6 | length 2389.2
  Top Layer w10: TFT.6 443.15,1666.85 v1(445,1665) ; IC2.19 1440,1750.9 v1(1440,1820)
  Layer 1 w10: v1(445,1665) 445,2270.93 445,2275.07 450.86,2280.93 514.73,2324.8 621.62,2389.45 624.54,2392.38 SD.3
  Bottom Layer w10: v1(445,1665) 692.08,1665 748.62,1608.46 1433.46,1608.46 1440,1615 v1(1440,1820)
12: IC2.20 SD.4 TFT.7 | length 2543.7
  Top Layer w10: TFT.7 629.14,1568.43 635,1562.57 v1(635,1535) ; v1(960,1540) 1014.06,1594.06 1014.06,1654.13 1055.55,1695.63 1475.63,1695.63 1488.94,1708.94 IC2.20
  Layer 1 w10: TFT.7 210,1653.43 210,2165 311.75,2266.75 603.33,2440.55 603.8,2440.91 SD.4 ; v1(635,1535) 637.68,1537.68 645.54,1537.68 647.86,1540 v1(960,1540)
12v: "5v Reg.1" c11.2 On/Off.2 r6.1 | length 2457.8
  Top Layer w10: c11.2@1504.45,863.54 c11.2 c11.2@1512.99,865
  Top Layer w25: r6.1 770,1716.26 v1(770,870) ; c11.2@1504.45,863.54 1504.45,1007.77 ; 1504.45,1082.95 1504.45,1007.77 ; c11.2@1512.99,865 v1(1575,865) ; On/Off.2 1869.03,1007.77 1504.45,1007.77
  Layer 1 w10: v1(770,870) 956.86,870 986.86,900 1150.07,900 1185.07,865 v1(1575,865)
12v_IN: On/Off.1 Power.1 | length 368.3
  Top Layer w25: On/Off.1 2086.22,1146.22 Power.1
13: IC2.21 SD.5 | length 1729
  Top Layer w15: SD.5 724.06,2610 v1(860,2610) ; IC2.21 1539.47,1750.37 1539.47,1859.47 v1(1540,1860)
  Layer 1 w15: v1(860,2610) 860,2563.79 868.79,2555 1220,2555 1430,2345 1430,1933.79 1438.79,1925 1531.21,1925 1540,1916.21 v1(1540,1860)
14: ADS1293.20 IC2.22 | length 984.8
  Top Layer w10: ADS1293.20 2314.68,2146.26 2314.68,2065.32 v1(2315,2065)
  Top Layer w15: IC2.22 1589.47,1750.37 1589.47,1829.47 v1(1590,1830)
  Layer 1 w15: v1(1590,1830) 2080,1830 v1(2315,2065)
15: ADS1293.15 IC2.8 | length 1190.2
  Top Layer w10: IC2.8 1337.17,2099.05 1431.23,2005 1630,2005 1665,2040 v1(1665,2090) ; v1(2150,2090) 2188.15,2090 2215.94,2117.79 ADS1293.15
  Layer 1 w10: v1(1665,2090) v1(2150,2090)
19: D1.2 IC2.13 J1.A7 J1.B7 | length 2282.2
  Top Layer w10: IC2.13 1182.16,1861.77 1218.31,1861.77 1316.54,1960 v1(1610,1960) ; D1.2 2637.8,1773.06 2639.69,1771.17 2653.83,1771.17 2690.16,1734.84 J1.A7 2755.24,1734.92 2824.92,1734.92 v1(2825,1735) ; v1(2640,1650) 2674.36,1650 v1(2714.72,1690.36) 2718.51,1690.36 2722.71,1694.57 2754.25,1694.57 J1.B7
  Bottom Layer w10: v1(1610,1960) 1845,1725 1845,1690 2035,1500 2310,1500 2339.8,1470.2 2460.2,1470.2 v1(2640,1650) ; v1(2714.72,1690.36) 2780.36,1690.36 v1(2825,1735)
20: D2.2 IC2.14 J1.A6 J1.B6 | length 2096.4
  Top Layer w10: v1(1125,1730) 1144.92,1749.92 1144.92,1786.34 1157.64,1799.05 IC2.14 ; D2.2 2643.9,1691.1 D2.2@2643.9,1693.04 ; v1(2645,1720) 2643.9,1718.9 D2.2@2643.9,1693.04 ; J1.B6 2756.06,1753.62 2793.55,1753.62 2809.93,1770 2849.14,1770 2855,1764.14 2855,1705.86 2849.14,1700 2809.93,1700 2793.86,1716.06 2756.06,1716.06 J1.A6 2680.16,1715.16 2658.83,1693.83 2644.68,1693.83 D2.2@2643.9,1693.04
  Layer 1 w10: v1(1125,1730) 1184.8,1789.8 2495.57,1789.8 2565.37,1720 v1(2645,1720)
21: IC2.23 TFT.4 | length 1706.6
  Top Layer w10: TFT.4 295.65,1864.35 484.35,1864.35 v1(485,1865) ; IC2.23 1640,1748.78 v1(1640,1665)
  Layer 1 w10: v1(485,1865) 555,1795 555,1585.86 560.86,1580 1555,1580 v1(1640,1665)
35: ADS1293.18 IC2.28 | length 566.3
  Top Layer w10: IC2.28 2003.04,1849.05 2167.44,2013.45 2187.12,2013.45 2275,2101.33 ADS1293.18
36: ADS1293.17 IC2.29 | length 535.9
  Top Layer w10: IC2.29 1919.05,1899.05 1935,1915 1965,1915 1980.95,1899.05 2027.86,1899.05 2160.06,2031.25 2179.75,2031.25 2255.31,2106.82 ADS1293.17
37: ADS1293.19 IC2.30 | length 693.8
  Top Layer w10: v1(1790,1945) 1854.37,1945 IC2.30 ; v1(2269.37,2060.63) 2269.37,2062.3 2287.63,2080.56 2287.63,2087.63 2294.68,2094.68 ADS1293.19
  Layer 1 w10: v1(1790,1945) 2153.74,1945 v1(2269.37,2060.63)
39: ADS1293.16 IC2.32 | length 437.7
  Top Layer w10: IC2.32 2172.38,2049.05 2235.63,2112.31 ADS1293.16
DGND: "3.3v Reg.2" "3.3v Reg.4" "5v Reg.2" "5v Reg.4" ADS1293.14 ADS1293.27 Boot.2 c1.2 c2.2 c5.2 c7.1 c8.1 c9.1 c10.1 c11.1 c12.2 c13.1 c14.2 c15.2 c16.2 c17.2 c18.2 c19.2 c20.2 D1.1 D2.1 D3.1 EN.1 Enter.2 IC2.1 IC2.16 IC2.40 IC2.41 IC2.42 IC2.43 IC2.44 IC2.45 IC2.46 IC2.47 IC2.48 IC2.49 J1.A1B12 J1.B1A12 J1.S1 J1.S2 J1.S3 J1.S4 Left.2 Power.2 Power.3 r7.2 r8.2 r9.2 Right.2 SD.6 TFT.2 | length 6886.2
  Top Layer w10: ADS1293.27 2374.33,2285.28 2403.51,2285.28 v1(2406.09,2287.85)
  Top Layer w15: v1(550,2060) 610.35,2060 676.5,2126.14 c16.2 ; EN.1 944.06,1845.94 v2(945,1845) ; v2@975,1645 v2(976.26,1646.26) r7.2 ; c14.2 1075,847.01 1075,906.21 1083.79,915 1256.21,915 1265,906.21 1265,857.01 c15.2 1262.99,846.14 1350,759.13 1350,629.72 Enter.2@1349.33,629.05 ; 1114.45,1304.1 1115,1304.65 1115,1365.53 1130,1380.53 v2(1130,1390) ; IC2.1 1261.18,2449.05 IC2.49 ; v2(1185,315) 1238.5,315 c19.2 ; IC2.16 1288.94,1878.94 v2(1289.47,1879.47) v2@1290,1880 ; c8.1 1328.25,1538.25 1328.25,1476.75 v2(1330,1475) 1395,1540 c9.1 ; v2(1335,1070) c12.2 ; v2(1445,800) c11.1 ; IC2.42 IC2.43 IC2.44 ; v2(1475,240) 1476.75,241.75 1476.75,313.25 c17.2 ; IC2.47 IC2.46 IC2.45 IC2.44 ; v2@1570,2200 v2(1569.76,2200.24) IC2.49 ; 1595,1082.95 1595,1327.05 v2(1595,1395) ; v2(1685,1480) 1686.5,1481.5 1686.5,1553.5 c10.1 ; v2(1700,255) 1703.5,258.5 c18.2 ; v2(1760,870) c13.1 1696.5,706.89 1779.33,624.06 Right.2 ; c20.2 1819.25,1554.25 1819.25,1485.75 v2(1820,1485) ; IC2.40 1864.37,2455 v2(1945,2455) ; Boot.2 2125.94,1774.06 2205,1695 v2(2205,1690) ; v2(2094.62,2165.38) 2104.09,2165.38 2123.13,2184.42 ADS1293.14@2175,2184.42 ; Power.2 Power.2@2408.46,910 ; Power.3@2526.57,1028.11 Power.3 ; D1.1 2612.2,1698.7 2617.2,1693.7 D2.1 ; D2.1@2616.59,1685.69 2600.91,1670 v2(2565,1670) 2571.7,1663.3 2571.7,1645.51 2612.89,1604.31 2616.59,1604.31 2617.2,1603.7 D3.1 2617.81,1599.39 2617.81,1584.64 2629.57,1572.89 2671.73,1572.89 2697.86,1599.02 J1.A1B12 ; r8.2@2656.26,1378.03 2680,1354.29 2680,1230 2695,1215 v2(2760,1215) 2851.26,1306.26 r9.2 ; v2(2685,1875) 2709.02,1850.98 J1.B1A12 ; J1.S1 2777.8,1514.95 2802.75,1490 v2(2860,1490) 2910,1490 2935.28,1515.28 J1.S3 ; J1.S2 2777.8,1946.21 2786.58,1955 v2(2855,1955) 2925,1955 2935.28,1944.72 J1.S4 ; IC2.44 IC2.41 IC2.48 IC2.49
  Top Layer w25: Power.2@2408.46,910 Power.3@2526.57,1028.11 ; 2560.04,1281.81 r8.2@2656.26,1378.03
  Top Layer w26: Power.3 2560.04,1281.81
  Top Layer w40: v2(910,720) 910,717.29 925,702.29 Left.2 ; c14.2 1073.07,844.92 1073.07,781.93 v2(1075,780) ; 1114.45,1060 1114.72,1059.72 1114.72,970.28 v2(1115,970) ; Enter.2@1349.33,629.05 Enter.2
  Bottom Layer w15: TFT.2 295.28,2060.28 549.72,2060.28 v1(550,2060) ; c7.1 2060,2205 2094.62,2170.38 v2(2094.62,2165.38) ; v1(2406.09,2287.85) 2442.85,2287.85 c1.2@2449.25,2294.25 ; c5.2 2445,1910 2445,1878.79 2453.79,1870 2680,1870 v2(2685,1875) ; c2.2 2449.25,2190.75 c1.2@2449.25,2294.25 ; c1.2 c1.2@2449.25,2294.25
En: c10.2 c16.1 EN.4 IC2.3 r5.2 | length 2095.2
  Top Layer w10: c16.1 613.5,2208.5 v1(615,2210) ; v1(745,2210) 817.68,2210 825,2202.68 v1(825,2280) ; EN.4 825.94,2197.8 885,2138.74 v1(885,2080) ; r5.2 r5.2@1060,1541.97 ; v1(1065,1670) 1065,1666.21 1060,1661.21 r5.2@1060,1541.97 ; v1(1095,2350) 1168.5,2350 IC2.3 ; c10.2 1548.61,1555 1521.88,1581.74 1128.91,1581.74 1106.78,1559.61 1077.64,1559.61 r5.2@1060,1541.97
  Layer 1 w10: v1(615,2210) v1(745,2210) ; v1(885,2080) 1065,1900 v1(1065,1670)
  Bottom Layer w10: v1(825,2280) 895,2350 v1(1095,2350)
In1: ADS1293.1 ECG.1 | length 208.4
  Top Layer w10: ADS1293.1 2334.05,2391.89 ECG.1
In2: ADS1293.2 ECG.2 | length 192.1
  Top Layer w10: ADS1293.2 2314.37,2431.26 ECG.2
In3: ADS1293.3 ECG.3 | length 175.8
  Top Layer w10: ADS1293.3 2294.68,2470.63 ECG.3
In4: ADS1293.4 ECG.4 | length 163.6
  Top Layer w10: ADS1293.4 ECG.4@2275,2500
  Top Layer w15: ECG.4 ECG.4@2275,2500
In5: ADS1293.5 ECG.5 | length 180.2
  Top Layer w10: ECG.5 2255.31,2460.63 2255.31,2345.31 2255,2345 2255.31,2344.69 ADS1293.5
In6: ADS1293.6 ECG.6 | length 229.8
  Top Layer w10: ECG.6 2151.89,2435.86 2157.75,2430 2215,2430 2234.72,2410.28 2234.72,2344.33 ADS1293.6
Net4.096MHz_1: 4.096MHz.1 ADS1293.24 c3.1 | length 564.1
  Top Layer w10: ADS1293.24@2373.47,2225.36 2374.37,2224.45 2425.55,2224.45 v1(2510,2140) ; v1(2655,2080) 2829.02,2080 4.096MHz.1
  Bottom Layer w10: v1(2510,2140) 2510,2093.5 c3.1 2641.21,2090 2651.21,2080 v1(2655,2080)
Net4.096MHz_2: 4.096MHz.2 ADS1293.23 c4.1 | length 510.4
  Top Layer w10: ADS1293.23 2394.91,2205.63
  Top Layer w12: 2394.91,2205.63 2402.97,2197.57 2402.97,2103.37 2436.34,2070 4.096MHz.2 2533.9,2070 2598.9,2005 v1(2625,2005)
  Bottom Layer w12: c4.1 2511.5,2005 v1(2625,2005)
NetADS1293_8: ADS1293.8 r2.2 | length 1105.9
  Top Layer w10: v1(1755,2120) 1750,2125 1750,2470 1805.89,2525.89 1979.18,2525.89 2176.57,2328.5 ADS1293.8
  Bottom Layer w10: v1(1755,2120) 1757.86,2120 1767.86,2110 r2.2
NetADS1293_9: ADS1293.9 c6.1 r3.1 | length 683.6
  Top Layer w10: v1(2075,2375) 2075,2340.07 2130.7,2284.37 ADS1293.9
  Bottom Layer w10: r3.1 2041.26,2021.97 2058.9,2039.61 2060.87,2039.61 2139.8,2118.54 2139.8,2275.27 2125.27,2289.8 2031.7,2289.8 c6.1 2026.5,2303.86 2041.57,2318.94 2050.43,2318.94 2074.5,2343 2074.5,2374.5 v1(2075,2375)
NetADS1293_10: ADS1293.10 c6.2 r2.1 r3.2 | length 721
  Top Layer w10: v1(2105,2255) 2108.79,2255 2118.63,2264.84 2176.42,2264.84 ADS1293.10
  Bottom Layer w10: r3.2 1948.74,2021.97 1966.38,2039.61 1972.83,2039.61 2041.26,2108.03 2041.26,2111.97 1989.97,2163.26 1936.63,2163.26 1900,2199.89 1900,2289.14 1905.86,2295 c6.2 1963.5,2286.14 1978.58,2271.06 1978.94,2271.06 2003.26,2246.74 2051.74,2246.74 2070,2265 2080,2265 2087.32,2257.68 2102.32,2257.68 v1(2105,2255)
NetADS1293_11: ADS1293.11 ADS1293.12 c7.2 | length 365.6
  Top Layer w10: v1(1930,2250) 1930,2246.21 1943.5,2232.71 1943.5,2232.39 1950.57,2225.31 2031.66,2225.31 2031.94,2225.6 2113.03,2225.6 2113.32,2225.31 2144.95,2225.31 ; ADS1293.12 2144.95,2225.31 ; ADS1293.11 2150.86,2245 2145,2239.14 2145,2225.37 2144.95,2225.31
  Bottom Layer w10: v1(1930,2250) 1932.68,2247.32 1932.68,2243.19 1962.01,2213.86 c7.2
NetADS1293_13: ADS1293.13 r4.2 | length 1072.5
  Top Layer w10: v1(2032.04,2156.26) 2032.04,2177.04 2060.63,2205.63 ADS1293.13
  Layer 1 w10: v1(1950,1880) 1819.93,1880 1640.2,2059.73 1640.2,2100.27 1694.93,2155 2030.77,2155 v1(2032.04,2156.26)
  Bottom Layer w10: r4.2 1950,1933.74 v1(1950,1880)
NetADS1293_25: ADS1293.25 r1.1 | length 692.6
  Top Layer w10: ADS1293.25 2374.33,2244.09 2435.91,2244.09 2490,2190 v1(2590,2190)
  Layer 1 w10: v1(2585,1825) 2585,1870 2570,1885 2570,2170 v1(2590,2190)
  Bottom Layer w10: r1.1 v1(2585,1825)
NetADS1293_26: ADS1293.26 c2.1 | length 181.5
  Top Layer w10: ADS1293.26@2374.78,2264.87 2375.87,2263.78 2388.91,2263.78 2388.99,2263.71 2394.47,2263.71 2395.12,2263.05 2461.95,2263.05 v1(2485,2240)
  Bottom Layer w10: v1(2485,2240) 2487.68,2237.32 2487.68,2222.68 2511.5,2198.86 c2.1
NetD3_2: D3.2 D4.2 J1.A4B9 J1.B4A9 | length 710
  Top Layer w10: D3.2 2644.69,1601.89 2644.69,1606.81 2667.87,1630 v1(2710,1630) 2710.26,1630.26 2754.9,1630.26 J1.A4B9 2799.49,1630.51 2825,1605 v1(2835,1605) ; D4.2 v1(2670,1495) ; v1(2710,1815) 2712.24,1817.24 2752.91,1817.24 J1.B4A9
  Bottom Layer w10: v1(2670,1495) 2670,1508.81 2766.19,1605 v1(2835,1605) ; v1(2710,1630) 2689.92,1650.08 2689.92,1794.92 v1(2710,1815)
NetJ1_A5: J1.A5 r8.1 | length 609.2
  Top Layer w10: J1.A5 2855.42,1675.79 2866.21,1665 v1(2870,1665)
  Top Layer w15: r8.1 2563.74,1381.97 2631.77,1450 v1(2715,1450)
  Layer 1 w15: v1(2715,1450) 2715,1560 2820,1665 v1(2870,1665)
NetJ1_B5: J1.B5 r9.1 | length 654.2
  Top Layer w10: J1.B5 2844.66,1793.9 2845.76,1795 v1(2925,1795) ; r9.1 2758.74,1381.97 2800,1423.23 2800,1440 v1(2805,1445)
  Layer 1 w10: v1(2805,1445) 2805,1520.44 2925,1640.44 v1(2925,1795)
pads on no net: ADS1293.7 ADS1293.21 ADS1293.29 Boot.1 Boot.4 EN.2 EN.3 Enter.1 Enter.4 IC2.9 IC2.10 IC2.11 IC2.15 IC2.24 IC2.25 IC2.26 IC2.31 IC2.33 IC2.34 IC2.35 IC2.36 IC2.37 IC2.38 IC2.39 J1.A8 J1.B8 Left.1 Left.4 Right.1 Right.4

## Polygon pours and split planes (outlines as drawn)
DGND on Layer 2 (split plane): 2340.47,2661.79 2434.43,2638.29 2462.7,2628.86 2530.37,2600.97 2603.85,2562.38 2681.99,2509.94 2734.33,2470.22 2804.71,2399.84 2838.72,2356.19 2864.62,2319.2 2920.47,2225.72 2956.07,2143.4 2977.79,2076.56 2987.83,2036.83 3003.4,1942.92 3006.7,1906.69 3008.75,1783.24 3003.43,1739.54 2985.04,1627.04 2961.53,1536.75 2927.16,1435.33 2903.31,1376.45 2842.93,1252.35 2824.46,1219.11 2733.9,1075.88 2683.22,1007.05 2583.1,883.84 2516.32,807.77 2350.02,641.47 2301.95,599.14 2209.42,517.72 2032.96,375.79 1933.39,302.06 1748.86,175.14 1740.38,169.49 1529.42,35.03 1511,35.03 1510.88,35.1 1509.48,35.98 1507.33,37.06 1291.98,173.31 1280.91,180.7 1099.06,305.82 980.53,394.72 815.44,529.06 717.11,616.13 659.66,667.98 550.22,777.43 470.1,867.11 360.56,999.48 302.28,1079.69 225.2,1199.32 197.02,1248.66 138.9,1368.23 118.07,1417.34 77.36,1533.63 54.97,1623.2 36.53,1732.11 31.23,1772.11 31.23,1913.54 55.01,2054.77 59.42,2069.31 86.22,2155.53 121.01,2232.51 161.99,2302.75 180.23,2328.43 246.49,2414.77 319.99,2482.47 335.64,2494.99 413.4,2549.5 421.32,2554.78 491.48,2593.82 495.09,2595.62 573.55,2628.88 606.13,2639.56 699.48,2661.78 780.53,2674.37 906.74,2674.37 991.58,2661.77 1089.57,2638.39 1121.42,2628.8 1207.26,2591.85 1221.04,2584.96 1291.43,2540.17 1332.98,2509 1405.96,2438.16 1503.41,2295.72 1504.55,2294.37 1505.66,2292.99 1505.82,2292.86 1505.95,2292.7 1507.32,2291.6 1508.68,2290.46 1508.86,2290.36 1509.02,2290.24 1510.59,2289.42 1512.14,2288.57 1512.33,2288.51 1512.51,2288.42 1514.21,2287.92 1515.9,2287.4 1516.1,2287.37 1516.3,2287.32 1518.06,2287.16 1519.82,2286.97 1520.02,2286.99 1520.22,2286.97 1521.98,2287.17 1523.74,2287.32 1523.94,2287.38 1524.14,2287.4 1525.82,2287.93 1527.52,2288.43 1527.7,2288.53 1527.89,2288.59 1529.44,2289.44 1531.01,2290.26 1531.17,2290.39 1531.35,2290.48 1532.7,2291.62 1534.08,2292.73 1534.21,2292.89 1534.37,2293.02 1535.47,2294.39 1536.61,2295.75 1541.1,2302.35 1541.15,2302.44 1541.21,2302.52 1616.89,2416.03 1627.92,2430.61 1645.15,2453.1 1688.91,2496.86 1713.71,2515.92 1725.93,2525.08 1807.5,2579.31 1829.41,2592.03 1914.14,2627.34 1951.28,2639.54 2044.05,2661.04 2133.27,2674.37 2255.74,2674.37

## Silkscreen, mask and mechanical layers (free items; w line width, h text height)
Top Overlay:
  drawing of 3 lines, arcs and shapes, not listed
Bottom Overlay:
  drawing of 5 lines, arcs and shapes, not listed
Mechanical 1:
  lines w0.5: 1520,2295.2 1520,2306.6 ; 1520,2306.6 1524.71,2313.52 1600.71,2427.52 1612.13,2442.62 1630.2,2466.2 1675.8,2511.8 1701.72,2531.71 1714.48,2541.29 1797.02,2596.16 1820.58,2609.84 1907.22,2645.94 2036.22,2663.87 2131.8,2694.2 2257.2,2694.2 2344.34,2681.26 2439.98,2657.34 2469.62,2647.46 2538.78,2618.96 2614.02,2579.44 2693.52,2526.09 2747.4,2485.2 2819.6,2413 2854.68,2367.98 2881.28,2329.98 2938.16,2234.78 2974.64,2150.42 2996.86,2082.06 3007.26,2040.89 3023.09,1945.44 3026.51,1907.76 3028.6,1782.2 3023.07,1736.74 3004.46,1622.94 2980.54,1531.06 2945.76,1428.42 2921.44,1368.38 2860.52,1243.18 2841.52,1208.98 2750.29,1064.68 2698.91,994.92 2598.26,871.04 2530.8,794.2 2363.6,627 2315.05,584.26 2222.2,502.54 2045.08,360.09 1944.92,285.91 1759.98,158.72 1751.22,152.88 1535.2,15.2 1504.8,15.2 1500.62,18.24 1497.58,19.76 1281.18,156.68 1269.78,164.28 1087.48,289.71 968.32,379.09 802.6,513.94 703.88,601.35 646,653.6 535.8,763.8 455.06,854.18 344.89,987.32 285.91,1068.48 208.24,1189.02 179.48,1239.38 120.84,1360.02 99.56,1410.18 58.34,1527.94 35.54,1619.14 16.91,1729.16 11.4,1770.8 11.4,1915.2 35.66,2059.31 40.46,2075.14 67.64,2162.58 103.36,2241.62 145.31,2313.52 164.28,2340.22 231.8,2428.2 307.06,2497.53 323.74,2510.87 402.22,2565.88 410.98,2571.72 482.22,2611.36 486.78,2613.64 566.58,2647.46 600.74,2658.66 695.66,2681.26 779,2694.2 908.2,2694.2 995.34,2681.26 1094.74,2657.54 1128.22,2647.46 1215.62,2609.84 1230.82,2602.24 1302.72,2556.49 1345.88,2524.11 1421.2,2451 1520,2306.6
Board Shape:
  drawing of 186 lines, arcs and shapes, not listed